# EAGLE board blinkm_mk2b2 (EAGLE 6.4)
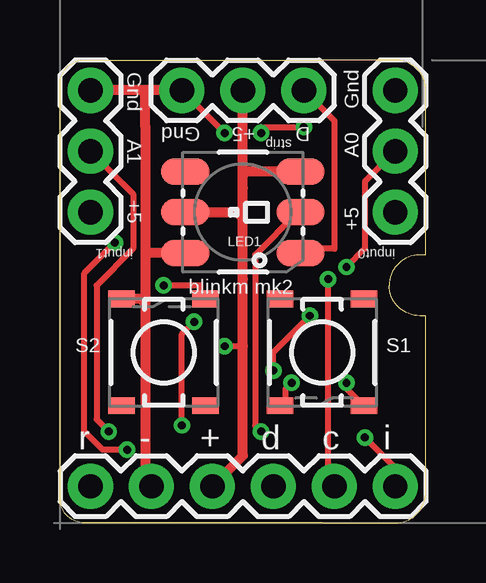
[diagram p0: board, top side]
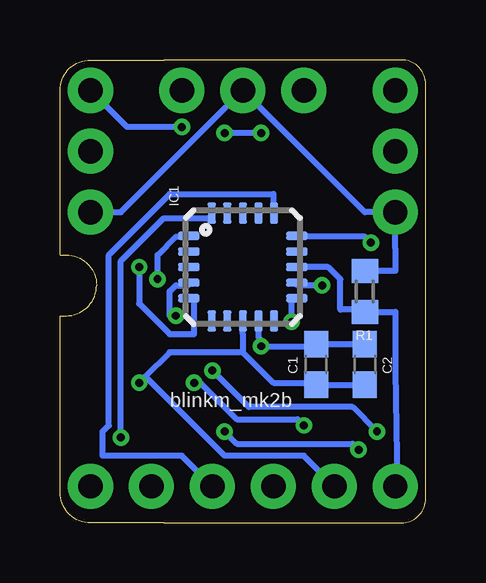
[diagram p1: board, bottom side, seen from below]

Size 15.24 x 19.3 mm. Coordinates in mm from the lower left corner, seen from the top.
Outline: 10.92,0 1.02,0 arc-90 0,1.02 0,18.29 arc-90 1.02,19.3 10.92,19.3 13.97,19.3 arc-90 15.24,18.03 15.24,11.18 14.99,11.18 arc90 13.72,9.91 arc90 14.99,8.64 15.24,8.64 15.24,1.27 arc-90 13.97,0 10.92,0
Copper layers (1*16): Top 0.0356mm / dielectric 1.5011mm / Bottom 0.0356mm
Design rules "LaenPCBOrder-tod": minimum track width 10mil, minimum drill 13mil, track to track 6mil, track to pad 8mil, pad to pad 8mil, via to via 8mil, smd to smd 6mil, copper to edge 15mil, drill to drill 8mil, minimum pad ring 7mil, minimum via ring 7mil, stop-mask expansion 4mil, vias tented up to drill 25mil, thermal gap 10mil
tRestrict: area -1.3,3.8 to 0,11.4
bRestrict: area 6.6,9.4 to 8.9,11.9

## Footprints (pad centres in the part's own frame; a part is rotated, then mirrored left to right if it is on the bottom)
C0603 = smd 1.1 x 1: 1 -0.85,0; 2 0.85,0
QFN/MLF20 = smd 0.9 x 0.35: 1 -2.25,1.3; 2 -2.25,0.65; 3 -2.25,0; 4 -2.25,-0.65; 5 -2.25,-1.3; 11 2.25,-1.3; 12 2.25,-0.65; 13 2.25,0; 14 2.25,0.65; 15 2.25,1.3 | smd 0.35 x 0.9: 6 -1.3,-2.25; 7 -0.65,-2.25; 8 0,-2.25; 9 0.65,-2.25; 10 1.3,-2.25; 16 1.3,2.25; 17 0.65,2.25; 18 0,2.25; 19 -0.65,2.25; 20 -1.3,2.25
1X03 = drill 1.016 pad 1.88: 1 0,0; 2 2.54,0; 3 5.08,0
1X06 = drill 1.016 pad 1.88: 1 0,0; 2 2.54,0; 3 5.08,0; 4 7.62,0; 5 10.16,0; 6 12.7,0
LED-TRICOLOR-5050-IC = smd 2 x 1.1: 1 -2.4,1.7; 2 -2.4,0; 3 -2.4,-1.7; 4 2.4,-1.7; 5 2.4,0; 6 2.4,1.7
R0603 = smd 1 x 1.1: 1 -0.85,0; 2 0.85,0
TACTILE_SWITCH_SMD-2 = smd 0.7 x 1.1: 1 2.225,1.75; 2 2.225,-1.75; 3 -2.225,-1.75; 4 -2.225,1.75

## Placement (x,y rotation side)
C1  100nF  [C0603]  4.57,6.6 270 bottom
C2  10uF  [C0603]  2.54,6.6 270 bottom
IC1  ATTINY24/44/84-MU  [QFN/MLF20]  7.62,10.67 0 bottom
JP1  strip  [1X03]  10.16,18.03 180 top
JP2  input0  [1X03]  13.97,18.03 270 top
JP3  input1  [1X03]  1.27,18.03 270 top
JP4  [1X06]  1.27,1.52 0 top
LED1  LED-TRICOLOR-5050-ICWS2811  [LED-TRICOLOR-5050-IC]  7.62,12.95 180 top
R1  10k  [R0603]  2.54,9.65 90 bottom
S1  SWITCH-MOMENTARY-2SMD-2  [TACTILE_SWITCH_SMD-2]  10.92,7.11 270 top
S2  SWITCH-MOMENTARY-2SMD-2  [TACTILE_SWITCH_SMD-2]  4.32,7.11 90 top

## Library data of the parts
C1 C2 R1 = rcl
IC1 = attiny24_44_84
JP1-JP3 = SparkFun-20110517
JP4 = SparkFun-Connectors
LED1 = SparkFun-LED
S1 S2 = SparkFun-Electromechanical

## Nets
+5V: C1.1 C2.1 IC1.9 JP1.2 JP2.3 JP3.3 JP4.3 LED1.3 LED1.5 R1.2
A0: IC1.5 JP2.2
A1: IC1.4 JP3.2
A2: IC1.3
DI: IC1.15 LED1.2
DO: JP1.1 LED1.1
GND: C1.2 C2.2 IC1.8 JP1.3 JP2.1 JP3.1 JP4.2 LED1.6 S1.1 S2.1
MISO: IC1.20 JP4.6
RESET: IC1.13 JP4.1 R1.1
S1: IC1.11 S1.2
S2: IC1.12 S2.2
SCL: IC1.1 JP4.5
SDA: IC1.16 JP4.4

## Tracks (layer width: path | path; a pad name or v marks a point on that pad's centre or on a via)
+5V  (via drill 0.33)
  Top 0.254: 7.62,7.37 v6.86,7.37
  Top 0.406: JP4.3 7.62,2.79 7.62,7.37 7.62,10.16 7.62,12.7 | 7.62,12.7 7.62,14.48 | 7.62,14.48 JP1.2 | LED1.5 7.37,12.95 7.62,12.7 | 7.62,12.7 7.62,13.97 | LED1.3 9.4,14.65 7.62,14.65 7.62,14.48
  Bottom 0.254: JP2.3 12.7,12.95 JP1.2 2.54,12.95 JP3.3 1.27,11.43 1.27,10.5 R1.2 | C2.1 C1.1 4.66,7.37 6.6,7.37 | IC1.9 6.97,7.73 6.6,7.37 | v6.86,7.37 6.6,7.37
A0  (via drill 0.33)
  Top 0.254: v11.94,10.67 12.7,11.43 12.7,14.22 JP2.2
  Bottom 0.254: v11.94,10.67 11.94,9.14 10.67,7.87 9.65,7.87 9.65,9.4 IC1.5
A1  (via drill 0.33)
  Top 0.254: v10.41,8.64 8.89,7.11 v8.89,6.35 | v2.03,3.81 1.52,4.32 1.52,9.91 3.05,11.43 3.05,13.72 JP3.2
  Bottom 0.254: v10.41,8.64 10.67,8.64 10.67,9.65 10.41,9.91 9.91,9.91 IC1.4 | v8.89,6.35 7.37,4.83 3.05,4.83 v2.03,3.81
DI  (via drill 0.33)
  Top 0.254: v2.29,11.68 1.02,10.41 1.02,3.81 1.78,3.05 v2.79,3.05 | v8.38,3.81 8.13,4.06 8.13,11.18 9.91,12.95 LED1.2
  Bottom 0.254: v2.29,11.68 2.54,11.94 5.33,11.94 IC1.15 | v2.79,3.05 3.05,3.3 7.87,3.3 v8.38,3.81
DO
  Top 0.254: JP1.1 11.43,16.76 11.43,11.43 10.16,11.43 LED1.1
GND  (via drill 0.33)
  Top 0.254: v11.94,5.84 11.94,5.59 12.45,5.08 S1.1 | v10.16,16.51 8.38,16.51 v8.38,16.26 | JP1.3 v6.86,16.26
  Top 0.406: JP1.3 3.56,18.03 | 3.56,18.03 JP3.1 | 3.56,11.18 3.56,16.51 3.56,18.03 | 3.56,11.18 3.56,9.14 | 3.56,9.14 3.56,8.89 3.56,3.05 3.56,1.78 JP4.2 | 3.56,9.14 3.36,9.34 S2.1 | LED1.6 3.63,11.25 3.56,11.18
  Bottom 0.254: 7.62,8.38 IC1.8 | 7.62,8.38 IC1.8 | 7.62,8.38 7.62,7.87 7.62,7.11 | 7.62,8.38 IC1.8 | 4.57,5.84 C1.2 | C1.2 C2.2 | 7.62,7.11 6.35,5.84 4.66,5.84 C1.2 | 11.68,6.1 10.67,7.11 7.62,7.11 | 11.68,6.1 v11.94,5.84 | 11.68,6.1 8.38,2.79 5.08,2.79 JP4.2 | JP2.1 12.45,16.51 v10.16,16.51 | v6.86,16.26 v8.38,16.26
  pour Top: 21.34,22.86 21.34,0 20.07,0 20.07,22.86
MISO  (via drill 0.33)
  Top 0.254: v12.7,3.56 13.97,2.29 JP4.6
  Bottom 0.254: v12.7,3.56 12.7,10.92 10.92,12.7 8.89,12.7 IC1.20
RESET
  Bottom 0.254: JP4.1 1.18,1.61 1.27,6.35 1.27,7.62 1.27,8.8 R1.1 2.54,8.89 3.56,8.89 3.56,10.16 4.06,10.67 5.33,10.67 IC1.13
S1  (via drill 0.33)
  Top 0.254: v5.59,8.38 5.08,7.87 v5.08,4.06 | v9.65,5.84 9.4,5.59 9.4,5.08 S1.2
  Bottom 0.254: v5.59,8.38 5.59,9.4 IC1.11 | v5.08,4.06 5.33,4.32 7.87,4.32 9.4,5.84 v9.65,5.84
S2  (via drill 0.33)
  Top 0.254: v4.32,9.91 5.84,9.91 5.84,9.4 S2.2
  Bottom 0.254: v4.32,9.91 5.33,9.91 IC1.12
SCL  (via drill 0.33)
  Top 0.254: v11.18,10.16 11.18,1.78 JP4.5
  Bottom 0.254: v11.18,10.16 11.18,11.18 10.41,11.94 9.91,11.94 IC1.1
SDA
  Bottom 0.254: JP4.4 10.16,2.79 13.46,2.79 13.46,3.81 13.21,4.06 13.21,11.18 10.67,13.72 6.35,13.72 6.35,12.95 IC1.16

## Text on the board
tPlace: Gnd | Gnd | +5 | D | Gnd | A1 | strip | A0 | +5 | +5 | input1 | input0 | blinkm mk2 | r | - | + | d | c | i
bPlace: blinkm_mk2b